# Altium PCB 0027.PcbDoc
Units mm, origin at the board's own origin, x right, y up, seen from the top; angles counter-clockwise.
Board outline 152.4 x 101.6 mm, 2 copper layers (Top Layer, Bottom Layer); 9 components, 4 nets, 14 pads, 36 vias.
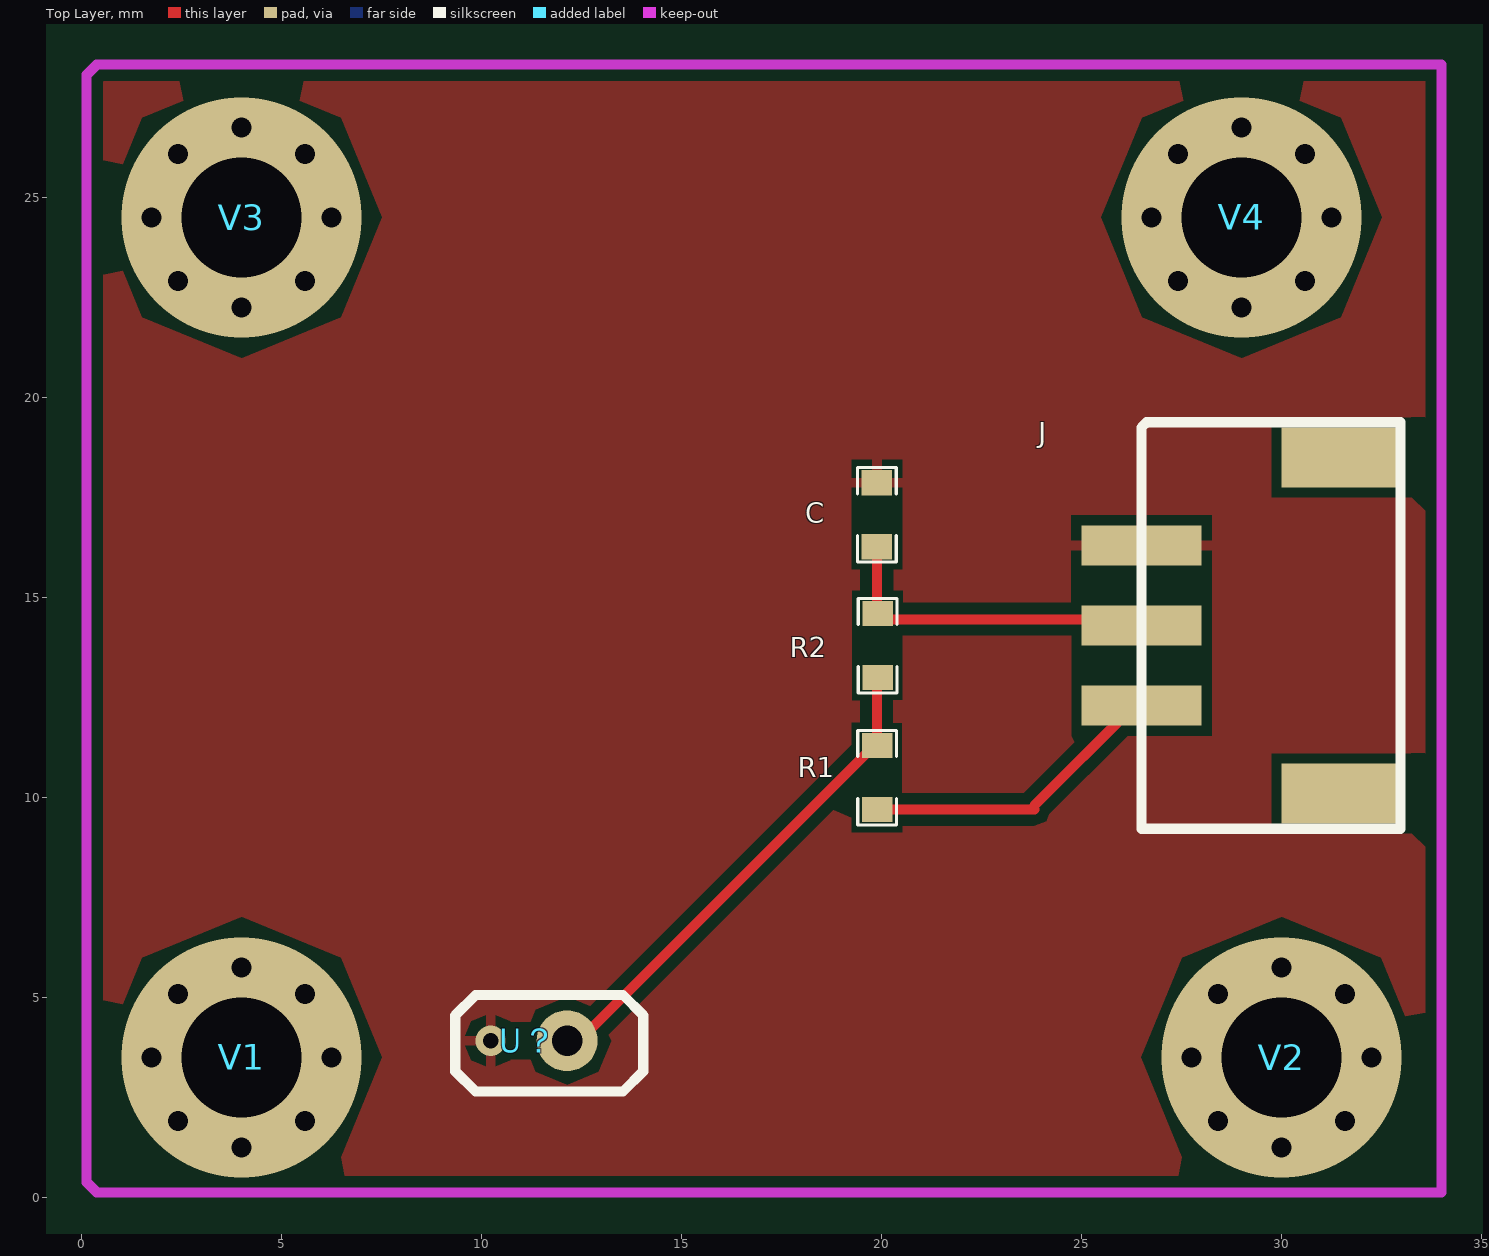
[diagram p0: Top Layer view]
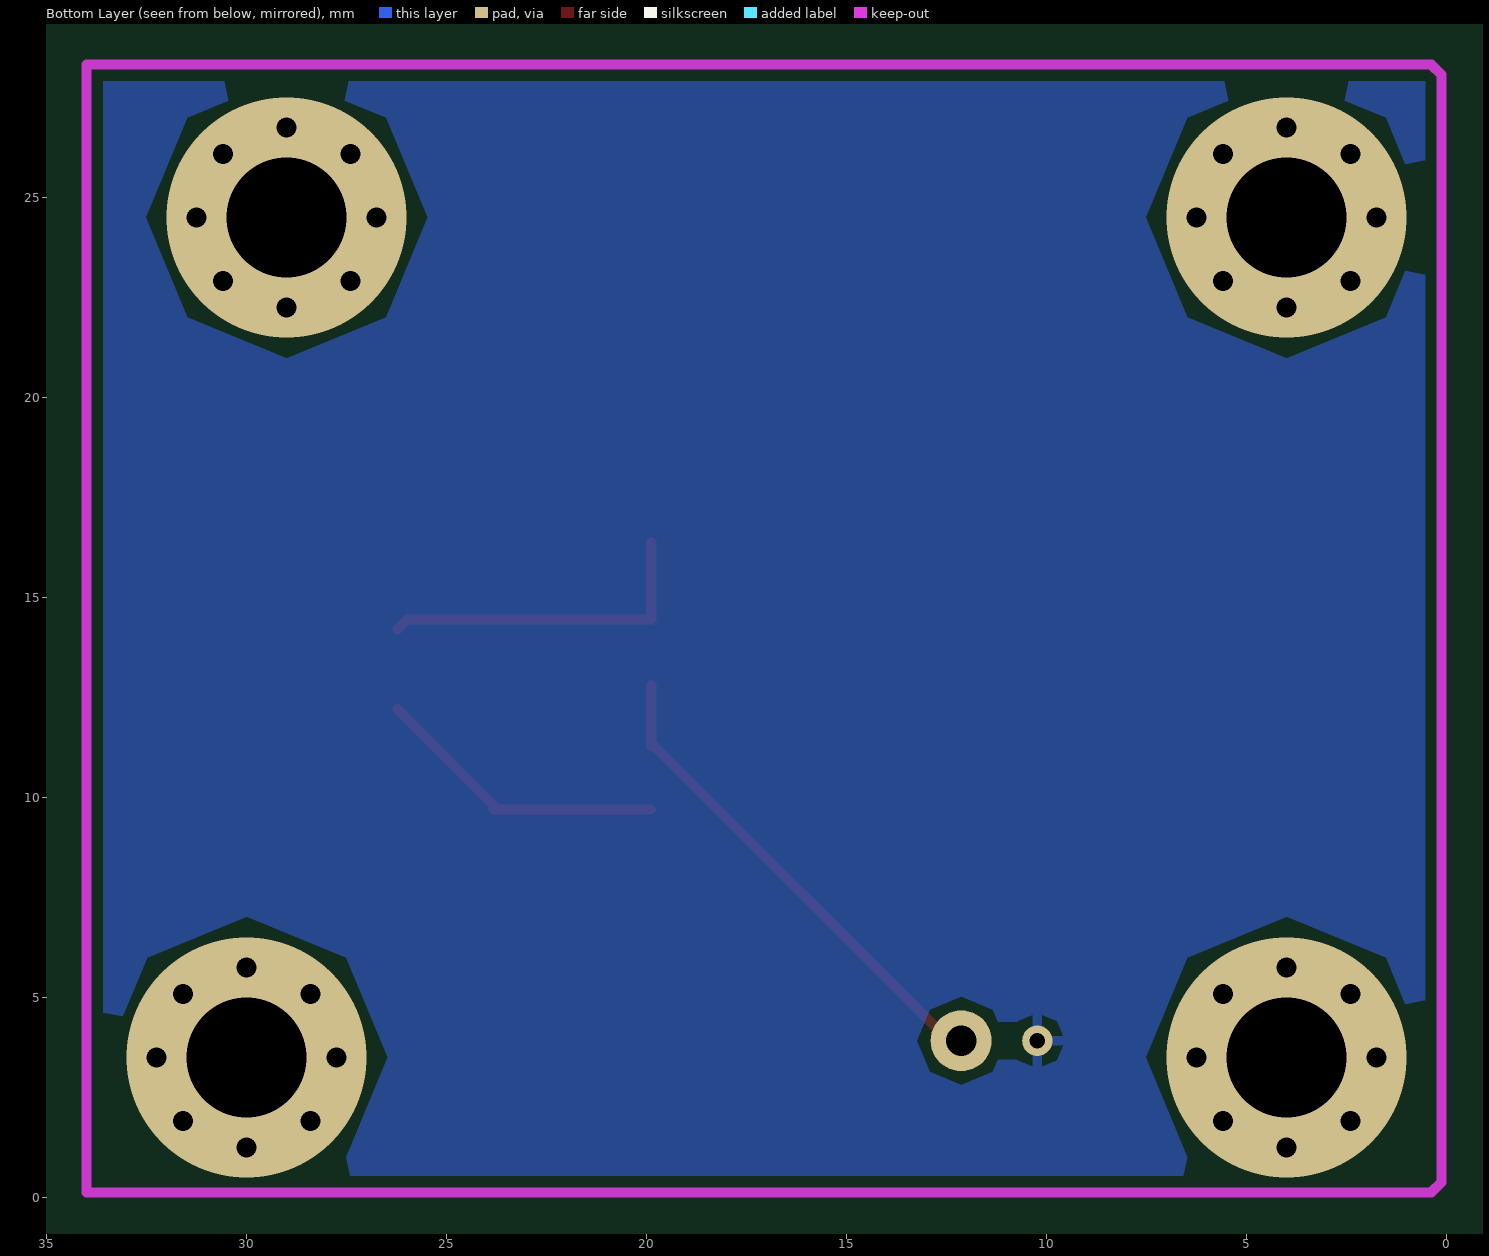
[diagram p1: Bottom Layer view, seen from below]

## Layer stack, top to bottom
Top Layer: signal copper 0.0356
Dielectric: dielectric 0.32, FR-4, Dk 4.8
Bottom Layer: signal copper 0.0356

## Board outline
-43.307,-42.164 109.093,-42.164 109.093,59.436 -43.307,59.436

## Design rules (kind name [scope] priority, off if disabled: settings)
Clearance [All] p1: gap=0.254
PolygonConnect [All] p1: connectstyle=Relief reliefconductorwidth=0.254 reliefentries=4 polygonreliefangle="90 Angle"
RoutingVias [All] p1: holewidth=0.711 width=1.27 viastyle="Through Hole" minholewidth=0.711 minwidth=1.27 maxholewidth=0.711 maxwidth=1.27
SilkscreenOverComponentPads [All] p1: minsilkscreentomaskgap=0.254
SolderMaskExpansion [All] p1: expansion=0.102
Width [All] p1: maxlimit=0.254 minlimit=0.254 preferedwidth=0.254
27 further rules are at their usual default settings.

## Classes and differential pairs
component class 0027: J U？ V1 V2 V3 V4

## Components (designator, comment, footprint, x,y, rotation, side; value= is the part's Value field where it differs from the comment)
C "10nf" 0603E 19.884,16.372 r90 top
J "sh-2.0" sh-2.0 26.5,14.3 r90 top
R1 "Comment" 0603E 19.887,9.8 r90 top
R2 "Comment" 0603E 19.9,13.1 r90 top
U？ "sw-18015" sw-18015 12.137,3.918 r180 top
V1 "Via" Via 4,3.5 r0 top
V2 "Via" Via 30,3.5 r0 top
V3 "Via" Via 4,24.5 r0 top
V4 "Via" Via 29,24.5 r0 top

## Footprints (in the part's own frame and the unit in brackets; to place one, negate y for a bottom-side part, rotate by r counter-clockwise, add the part's x,y. Pads: shape width x height; smd on the part's side, far side on the other; paste and mask are expansions set on the pad)
0603E [mm]
  rect 0.635x0.762 smd: 1(-0.1,0) 2(1.5,0)
  silkscreen extent -0.48,-0.48 1.88,0.48
sh-2.0 [mm]
  rect 1x3 smd: 1(-2,0) 2(0,0) 3(2,0) 3(2,0)
  rect 1.5x3 smd: GND(-4.2,-5) GND(4.2,-5)
  silkscreen extent -5.08,-6.48 5.08,0
sw-18015 [mil]
  round 30 hole 15: 0(75,0)
  round 60 hole 30: 1(0,0)
  silkscreen extent -75,-45 110,50
Via [mm]

## Via types
v1: diameter 1, hole 0.5, Top Layer to Bottom Layer, 32 vias
v2: diameter 6, hole 3, Top Layer to Bottom Layer, 4 vias

## Nets (pads, with @x,y where several pads share a name; then routed paths per layer and width w, separated by ;. In a path a pad name is that pad's centre, name@x,y a point inside that pad or via, vN(x,y) a via of type N, cw(c..) or ccw(c..) an arc to the next point about the centre after c; other vN are vias at no path point)
+5: C.1 J.2 R2.2 | length 8.4
  Top Layer w0.254: C.1@19.884,16.372 19.884,14.451 25.98,14.451 J.2@26.226,14.205
GND: C.2 J.3 U？.0
NetJ_1: J.1 R1.1 | length 7.3
  Top Layer w0.254: R1.1 23.821,9.7 ; 23.821,9.8 J.1@26.226,12.205
NetR1_1: R1.2 R2.1 U？.1 | length 12.3
  Top Layer w0.254: U？.1 12.437,3.918 19.795,11.276 19.884,11.276 R2.1@19.884,12.8
pads on no net: J.GND
copper on no net:
  other v1: 4,1.25 30,1.25 2.409,1.909 5.591,1.909 28.409,1.909 31.591,1.909 1.75,3.5 6.25,3.5 27.75,3.5 32.25,3.5 2.409,5.091 5.591,5.091 28.409,5.091 31.591,5.091 4,5.75 30,5.75 4,22.25 29,22.25 2.409,22.909 5.591,22.909 27.409,22.909 30.591,22.909 1.75,24.5 6.25,24.5 26.75,24.5 31.25,24.5 2.409,26.091 5.591,26.091 27.409,26.091 30.591,26.091 4,26.75 29,26.75
  other v2: 4,3.5 30,3.5 4,24.5 29,24.5

## Polygon pours and split planes (outlines as drawn)
GND on Bottom Layer "Top Layer-No Net" (solid, pour order 6): 0.127,28.067 0.381,28.321 34,28.321 34,0.127 33.919,0.208 0.3,0.208 0.127,0.381
GND on Top Layer "Top Layer-No Net" (solid, pour order 4): 0.2,28.14 33.819,28.14 34,28.321 34,0.127 0.381,0.127 0.127,0.381

## Keep-outs
Keep-Out Layer:
  lines w0.254: 0.127,0.381 0.381,0.127 34,0.127 34,28.321 0.381,28.321 0.127,28.067 0.127,0.381

## Silkscreen, mask and mechanical layers (free items; w line width, h text height)
Top Solder:
  text "Sensor V2" at 13.193,25.846 h0.76
  text "Digital Vibration" at 10.145,23.433 h0.76